# Altium PCB opm.PcbDoc (part 6 of 6)
Units mil, origin at the board's own origin, x right, y up, seen from the top; angles counter-clockwise.
Board outline 4280 x 1445 mil, 4 copper layers (Signal Plane 1, Ground, Power, Signal Plane 2), stack 59.778 mil thick; 104 components, 61 nets, 369 pads, 159 vias.
Unrouted connection lines stored in the file: 4.
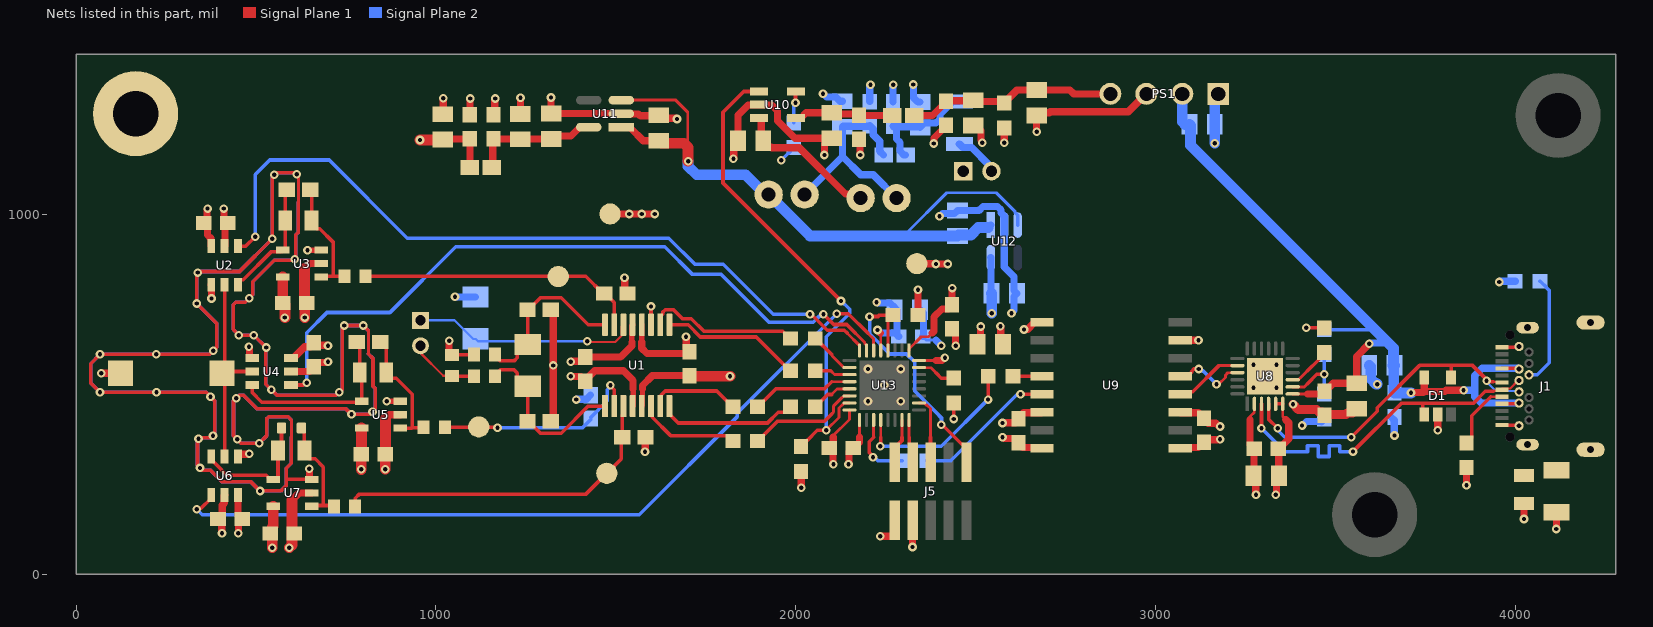
[diagram p4: the nets of this part, all layers, seen from the top]

## Via types
v1: diameter 24, hole 12, Signal Plane 1 to Signal Plane 2, tented both sides, 150 vias
v2: diameter 24, hole 12, Signal Plane 1 to Signal Plane 2, tented bottom, 9 vias

## Nets (pads, with @x,y where several pads share a name; then routed paths per layer and width w, separated by ;. In a path a pad name is that pad's centre, name@x,y a point inside that pad or via, vN(x,y) a via of type N, cw(c..) or ccw(c..) an arc to the next point about the centre after c; other vN are vias at no path point)
+3V3_A: C2.1 C6.1 C8.1 C9.1 C11.1 C12.1 C14.1 C39.1 C40.1 FB3.2 U1.12 U2.2 U3.5 U4.2 U5.5 U6.2 U7.5 | length 1195
  Signal Plane 1 w15: U1.12@1546.77,467.01 1548,468.24 1548,515
  Signal Plane 1 w20: C14.1@394.09,153.04 C14.1@396.06,153.04 ; v1(405,113) 404.23,113.77 404.23,144.87 C14.1@396.06,153.04 ; v1(410,1016) 410.77,1015.23 410.77,985.69 420.45,976 C8.1@421.46,976 413.56,968.09 413.56,912.79 U2.2@412.56,911.79 ; U6.2@412.56,219.29 411.56,218.29 411.56,197.04 405.75,191.23 405.75,162.72 C14.1@396.06,153.04 ; U4.2@596.75,563 648.43,563 660,574.57 C11.1@660,576.54 660,578.5 669.69,588.19 697.11,588.19 698.92,590 v1(700,590) ; C39.1@1019,1207.69 1020.42,1209.11 1092.58,1209.11 C40.1@1094,1210.54 1094.22,1210.31 1094.22,1130.22 FB3.2@1094.45,1130 ; C39.1@1020.35,1206.77 C39.1@1020.42,1206.69 ; v1(1375,550) 1375.77,549.23 1402.3,549.23 1403.35,548.19 1405.31,548.19 C2.1@1415,538.5 ; C2.1@1415,536.54 C2.1@1415,538.5 ; 1548,515 1548,538.46 1521.46,565 1441.5,565 C2.1@1415,538.5
  Signal Plane 1 w30: C12.1@539.09,113.04 540.31,113.04 545,108.35 v1(545,73) ; C12.1@541.06,113.04 545.75,117.72 545.75,131.03 547.56,132.84 U7.5@547.56,188.24 ; U3.5@573.92,825.64 574.01,825.64 574.01,753.13 C6.1@574.09,753.04 575.31,753.04 580,748.35 v1(580,713) ; v1(792,291) 792,332.46 C9.1@792.54,333 ; C9.1@793.36,333.82 U5.5@793.36,405.6 ; v1(955.77,1206.77) C39.1@1020.35,1206.77
+3V3_D: C1.1 C22.1 C42.1 C47.1 C48.1 C49.1 C50.1 C51.1 J5.1 pad.16 R16.1 R21.2 U1.13 U9.14 U12.5 U13.1 U13.5 U13.17 | length 1581.1
  Signal Plane 1 w8: 2177.61,380 U13.17@2177.61,428.34 ; v1@2235,670 2236.66,668.34 U13.5@2236.66,621.35 ; U13.1@2315.4,621.35 2315.4,625.6 2349.31,659.51 2369.51,659.51 2380,670
  Signal Plane 1 w15: U1.13@1572.36,467.01 1574.29,468.94 1574.29,515
  Signal Plane 1 w20: 1574.29,515 1574.29,524.29 1601.54,551.54 C1.1@1705,551.54 ; R16.1@2015,285.48 2015.5,284.98 2015.5,240.5 v1(2016,240) ; v1(2147,305) 2147,306.08 2148.35,307.43 2148.35,340.31 2158.03,350 C51.1@2160,350 ; C51.1@2161.97,350 2177.61,365.64 2177.61,380 ; v1(2227.61,678.48) 2227.61,677.39 v1@2235,670 ; v1(2235,105) 2270.43,105 2275,109.57 J5.1@2275,149.88 ; pad.16@2337,863 2337.5,862.5 2389.5,862.5 v1(2390,862) v1(2423,862) ; R21.2@2339.52,720 2339.76,720.24 2339.76,789.76 v1(2340,790) ; 2380,670 2385,675 2385,715 2406.81,736.81 2425.31,736.81 2435,746.5 C50.1@2435,748.46 v1(2435,795) ; C49.1@2506,629 2513.54,636.54 2513.54,687.23 v1(2514.31,688) ; v1(2575,420) 2575.77,420.77 2610.31,420.77 2620,430.45 C22.1@2620,431.93 ; C22.1@2620,433.9 2634.29,448.19 2683.19,448.19 U9.14@2685,450
  Signal Plane 1 w30: C1.1@1705,551.54 1706.54,550 v1(1817.5,550)
  Signal Plane 2 w8: C47.1@2281.55,664.99 C47.1@2281.55,670
  Signal Plane 2 w20: v1(2225,756) 2226.08,756 2228.58,753.5 2262.69,753.5 2274.69,741.5 C48.1@2274.69,735 ; v1(2227.61,678.48) 2228.69,678.48 2237.48,669.69 2276.85,669.69 2281.55,664.99 C47.1@2286.54,660 ; C48.1@2279.74,734.91 2281.55,733.11 C47.1@2281.55,670 ; U12.5@2542.6,879.71 2543.38,878.92 2543.38,781.31 C42.1@2544.69,780
  Signal Plane 2 w30: C42.1@2544.69,780 2545,779.69 v1(2545,725)
ADC_CS: R22.1 U1.2 | length 428.7
  Signal Plane 1 w10: U1.2@1623.54,692.99 1623.54,715.83 1630.06,722.35 1630.06,727.27 1637.69,734.9 1660.58,734.9 1685.48,710 1710,710 1745,675 1964.57,675 1984.57,655 R22.1@1985.48,655
ADC_DIN: R24.1 U1.16 | length 387.8
  Signal Plane 1 w10: U1.16@1649.13,467.01 1649.13,444.17 1673.31,420 1921.89,420 1951.96,450.08 1969.64,450.08 1984.57,465 R24.1@1985.48,465
ADC_DOUT: R2.2 U13.12 | length 284.3
  Signal Plane 1 w8: 2100,534.68 U13.12@2150,534.68
  Signal Plane 1 w10: R2.2@1894.52,465 1895.43,465 1945.43,515 2080.32,515 2100,534.68
ADC_DRDY: R1.2 U13.14 | length 317.1
  Signal Plane 1 w8: 2100,445 2105,450 2105,466.46 2106.13,467.59 2106.13,467.7 2128.43,490.01 2128.99,490.01 2134.3,495.31 U13.14@2150,495.31
  Signal Plane 1 w10: R1.2@1894.52,370 1949.52,425 2080,425 2100,445
ADC_SCLK: R23.1 U1.1 | length 389.4
  Signal Plane 1 w10: U1.1@1649.13,692.99 1700.99,692.99 1734.99,659 1890.57,659 1984.57,565 R23.1@1985.48,565
D_N: D1.4 J1.A7 J1.B7 U8.4 | length 964.9
  Signal Plane 1 w6: 3940,534.09 3961.9,534.09 J1.A7@3963.74,532.24
  Signal Plane 1 w10: U8.4@3314.84,473.18 3314.84,430.16 v1(3340,405) ; v1(3545,380) 3617.23,452.23 3617.23,462.53 3734.7,580 3820,580 ; D1.4@3822.4,545.98 3822.34,546.04 3822.34,577.66 3820,580 ; 3940,534.09 3939.77,534.32 3923.68,534.32 v1(3921,537) 3921,540.79 3881.79,580 3820,580
  Signal Plane 2 w6: v1(3921,537) 3921,534 3940,515 3945.75,509.25 J1.B7@4011.18,509.25
  Signal Plane 2 w10: v1(3340,405) 3340,400.13 3360.13,380 v1(3545,380)
D_P: D1.1 J1.A6 J1.B6 U8.3 | length 1018.9
  Signal Plane 1 w6: 3940,508.65 3941.01,509.65 3959.73,509.65 J1.A6@3963.54,513.46 ; J1.A6@3963.54,515.16 3963.85,515.46 3985.9,515.46 J1.B6@4011.18,540.75
  Signal Plane 1 w10: v1(3295,405) 3295.16,405.16 U8.3@3295.16,473.18 ; v1(3549.59,340.41) 3683.44,474.26 3743.51,474.26 ; D1.1@3747.6,444.02 3743.51,448.1 3743.51,474.26 ; 3940,508.65 3939.23,507.87 3917.21,507.87 3883.59,474.26 3743.51,474.26
  Signal Plane 2 w10: v1(3295,405) 3359.59,340.41 3418,340.41 3423,340.41 3423,356.94 3453,356.94 3453,326.72 3483,326.72 3483,356.94 3513,356.94 3513,340.41 3529,340.41 v1(3549.59,340.41)
DGND: C1.2 C2.2 C3.2 C4.2 C5.2 C6.2 C8.2 C9.2 C11.2 C12.2 C14.2 C22.2 C24.1 C26.2 C27.1 C28.1 C29.2 C30.1 C31.2 C32.1 C33.2 C34.2 C35.2 C36.2 C37.2 C38.2 C39.2 C40.2 C41.2 C42.2 C43.2 C44.2 C46.2 C47.2 C48.2 C49.2 C50.2 C51.2 J3.1 J5.3 pad.15 pad.MH1 PD1.A PS1.3 R14.2 R17.1 R19.2 R20.2 R26.1 U1.3 U1.4 U1.5 U2.3 U2.4 U3.2 U3.3 U4.3 U4.4 U5.2 U5.3 U6.3 U6.4 U7.2 U7.3 U9.9 U9.16 U10.2 U11.2 U12.2 U13.16 U13.32 | length 14657.5
  Signal Plane 1 w8: 617.56,1034 v1@617.56,1107.44 ; 812,612 812,677 ; 2104.72,380 2104.72,384.72 2150,430 U13.16@2150,455.94 ; U13.32@2343.01,593.74 2390,593.74
  Signal Plane 1 w9: 598,380 598,428
  Signal Plane 1 w10: v1@527,629 527,528 v1(542.5,512.5) 558,497 723,497 v1(731.5,505.5) 739,513 739,685.14 v1(744.86,691) v1(798,691) 812,677 ; v1(527.88,629.76) v1(493.64,664) v1(452,664) 436,680 436,749 443,756 470,756 491,777 491,813 550,872 604,872 v1(607,875) 610,878 610,943 617.56,950.56 617.56,1034 ; 598,380 598,308 584,294 584,263.04 ; 598,428 589,437 534.86,437 529,431.14 529,384 v1(509,364) 458,364 v1(447.5,374.5) 437,385 437,481 v1(445,489) 453,497 465,497 503,459 750,459 v1(765,444) 816,444 v1(823.5,451.5) 831,459 831,516 825,522 825,599 812,612 ; v1@617.56,1107.44 609,1116 556,1116 545,1105 v1(545,932) 454,841 404,841 340.86,841 335,835.14 v1(335,752) 390,697 390,630 371,611 v1(222.5,611) v1(66,611) 40,585 40,531 v1(66,505) v1(223,505) 361,505 385,481 385,389 375,379 342.86,379 337,373.14 337,302 351,288 374,288 406,256 486,256 v1(511,231) 569,231 584,246 584,263.04 ; U7.3@648.77,263.04 584,263.04 ; R19.2@1045.24,609.76 R20.2@1105.24,609.76 ; U1.3@1597.98,713.9 v1(1598,744) ; v1(2440,431) R26.1@2440,475.48
  Signal Plane 1 w15: v1@643.44,900.44 U3.3@680.92,900.44 ; U7.3@648.77,263.04 U7.3@654.84,263.04 ; U3.3@680.92,900.72 U3.3@681.2,900.44 ; v1(863,480) 863.2,480.2 900.44,480.2 U5.3@900.64,480.4 ; 1544.84,645 1544.84,691.06 U1.5@1546.77,692.99 ; 1572.36,645 U1.4@1572.36,692.99
  Signal Plane 1 w20: v1(69,558) PD1.A@123.25,558 ; v1(365,1016) 363.28,1014.28 363.28,984.74 C8.2@354.54,976 355.47,976 365.15,966.31 365.15,942.85 374.16,933.84 374.16,912.79 U2.3@375.16,911.79 ; U2.4@375.16,804.29 375.58,803.87 375.58,766.42 v1(376,766) ; U6.3@449.96,219.29 449.96,162.72 C14.2@459.65,153.04 ; U6.4@449.96,326.79 449.96,332.23 450.96,333.23 480.23,333.23 v1(481,334) ; v1(450,113) 450.77,113.77 450.77,143.35 460.45,153.04 C14.2@461.02,153.04 ; v1(480,632) 481.72,630.28 481.72,603.9 485.22,600.4 U4.4@489.25,600.4 ; U4.3@596.75,600.4 605,600.4 606,601.4 606,602.61 635.2,631.81 650.31,631.81 660,641.5 C11.2@660,642.71 ; 599.37,204.85 620.16,225.64 U7.2@654.84,225.64 ; 634.37,849.37 648.04,863.04 U3.2@681.2,863.04 ; v1(643,900) v1@643.44,900.44 ; v1(648,293) 648.77,292.23 U7.3@648.77,263.04 ; C11.2@660,643.46 667.53,635.94 697.98,635.94 698.92,635 v1(700,635) ; v1(859,291) v1@859.23,291.23 ; C9.2@859.23,332.77 C9.2@859.46,333 ; 859.46,432.46 870,443 U5.2@900.64,443 ; C39.2@1019,1278.31 1020,1279.31 v1(1020,1323) ; v1(1036.53,648.47) 1036.53,618 R19.2@1045,609.53 R19.2@1045.24,609.76 ; C40.2@1094,1277.46 1094.5,1277.96 1094.5,1321.5 v1(1095,1322) ; R20.2@1105.24,609.76 R20.2@1105.47,610 ; C38.2@1160,1277.46 1163.28,1280.74 1163.28,1320.28 v1(1165,1322) ; C37.2@1235,1279.31 v1(1235,1324) ; C44.2@1319.55,425 1326,431.45 v1(1326,580) 1326,728.55 C46.2@1319.55,735 ; v1(1320,1325) C36.2@1320,1280.31 U11.2@1514.99,1280.31 ; v1(1375,590) 1376.08,590 1377.89,591.81 1405.31,591.81 1415,601.5 C2.2@1415,603.46 1513.46,603.46 1544.84,634.84 1544.84,645 ; pad.15@1484,1001 v1(1537,1001) v1(1572,1001) v1(1608,1001) ; U11.2@1515.29,1280 1516.08,1279.22 1563.03,1279.22 1568.27,1273.98 C35.2@1614.76,1273.98 ; v1(1524,824) 1524.77,823.23 1524.77,787.78 C5.2@1532.55,780 ; 1572.36,645 1572.36,627.64 1586.72,613.28 1699.82,613.28 C1.2@1705,618.46 1695.77,627.7 1695.77,659.23 v1(1695,660) ; v1(1581,340) 1581.77,340.77 1581.77,379.22 C3.2@1582.55,380 ; C35.2@1620,1275.31 1628,1267.31 1666.61,1267.31 1668.92,1265 v1(1670,1265) ; v1(1827,1155) 1827.77,1155.77 1827.77,1193.38 C34.2@1839.39,1205 1839.39,1275.39 1868,1304 1897.69,1304 U10.2@1898.69,1305 1899.69,1304 1933.63,1304 1949.69,1287.93 1949.69,1260.37 1998.53,1211.54 C33.2@2080,1211.54 ; v1(2080,1165) 2080,1197.19 2094.5,1211.69 C33.2@2101,1211.69 ; C51.2@2093.07,350 C51.2@2094.55,350 ; 2104.72,380 2104.72,359.69 2095.04,350 C51.2@2094.55,350 ; v1(2105,305) 2104.23,305.77 2104.23,340.31 C51.2@2094.55,350 ; C32.1@2176,1208.54 2179.23,1205.3 2179.23,1165.77 v1(2180,1165) ; v1(2325,75) J5.3@2325,149.88 ; v1(2384,1197) 2384.77,1197.77 2384.77,1212.33 2418,1245.57 C30.1@2418,1247.54 ; 2390,593.74 2406.66,593.74 2413.92,601 v1(2415,601) ; C50.2@2435,681.54 2444.23,672.3 2444.23,635.77 v1(2445,635) ; C31.2@2494,1246.69 2500.5,1246.69 2515,1232.19 2515,1205.44 2519,1201.44 v1(2519,1199) ; v1(2569.31,689) 2570.07,688.23 2570.07,635.54 C49.2@2576.46,629.15 ; v1(2575,380) 2576.08,380 2579.43,376.65 2610.31,376.65 2610.77,376.2 2610.77,374.23 C22.2@2620,365 ; v1@2580,1200 R14.2@2580,1240.48 ; C22.2@2620,363.03 2631.22,351.81 2683.19,351.81 U9.16@2685,350 ; v1(2635,680) 2635.77,680.77 2645.1,680.77 2664.33,700 U9.9@2685,700 ; v1(2670,1230) C24.1@2670,1274.69 2678,1282.69 2705.13,1282.69 2707.43,1285 2925,1285 PS1.3@2975,1335
  Signal Plane 1 w30: v1(592.19,73.27) 599.37,80.45 599.37,108.35 C12.2@604.06,113.04 ; 599.37,204.85 599.37,117.72 C12.2@604.06,113.04 ; C12.2@606.02,113.04 C12.2@604.06,113.04 ; 634.37,849.37 634.37,757.72 639.06,753.04 C6.2@641.02,753.04 ; v1(635,713) C6.2@635,748.35 ; v1@859.23,291.23 C9.2@859.23,332.77 ; C9.2@859.46,333 859.46,432.46
  Signal Plane 2 w8: 617.56,1034 v1@617.56,1107.44 ; 812,612 812,677 ; C47.2@2353.46,660 2363.15,650.31 2389.69,650.31 2390,650
  Signal Plane 2 w9: 598,380 598,428
  Signal Plane 2 w10: v1@527,629 527,528 v1(542.5,512.5) 558,497 723,497 v1(731.5,505.5) 739,513 739,685.14 v1(744.86,691) v1(798,691) 812,677 ; v1(527.88,629.76) v1(493.64,664) v1(452,664) 436,680 436,749 443,756 470,756 491,777 491,813 550,872 604,872 v1(607,875) 610,878 610,943 617.56,950.56 617.56,1034 ; 598,380 598,308 584,294 584,246 569,231 v1(511,231) 486,256 406,256 374,288 351,288 337,302 337,373.14 342.86,379 375,379 385,389 385,481 361,505 v1(223,505) v1(66,505) 40,531 40,585 v1(66,611) v1(222.5,611) 371,611 390,630 390,697 v1(335,752) 335,835.14 340.86,841 404,841 454,841 v1(545,932) 545,1105 556,1116 609,1116 v1@617.56,1107.44 ; 598,428 589,437 534.86,437 529,431.14 529,384 v1(509,364) 458,364 v1(447.5,374.5) 437,385 437,481 v1(445,489) 453,497 465,497 503,459 750,459 v1(765,444) 816,444 v1(823.5,451.5) 831,459 831,516 825,522 825,599 812,612 ; v1@1960.13,1150 R17.1@1994.69,1184.57
  Signal Plane 2 w20: v1(1053,771) 1053.44,770.56 1109.56,770.56 C43.2@1110,770.12 ; v1(1390,485) 1390.77,485.77 1418.22,485.77 C4.2@1430,497.55 ; v1(1960,1150) v1@1960.13,1150 ; R17.1@1994.69,1184.57 R17.1@1994.69,1185.48 ; v1(2076,1335) 2077.08,1335 2085.78,1326.31 2111.5,1326.31 2123.5,1314.31 C28.1@2130,1314.31 ; C29.2@2206,1313.46 2206,1356.92 2208,1358.92 v1(2208,1360) ; C26.2@2271,1312.46 v1(2271,1360) ; v1(2327,1361) 2327.77,1360.23 2327.77,1324.31 2339.77,1312.31 C27.1@2346,1312.31 ; C48.2@2345.31,735 2355.31,725 2355.31,661.84 C47.2@2353.46,660 ; 2390,650 v1(2405,635) ; v1(2400,995) 2401.08,995 2408.39,1002.31 2442,1002.31 C41.2@2450,1010.31 2509.13,1010.31 2520.65,1021.83 2561.28,1021.83 2570.65,1012.46 2570.65,1004.24 2580,994.89 U12.2@2580,970.29 2580,853.95 2607.31,826.64 2607.31,788 C42.2@2615.31,780 2607.31,772 2607.31,733.39 2600,726.08 v1(2600,725)
  other v1: 344,295 339.93,376.07 380,384 373,493 380.5,620.5 480.5,766.5 337.93,838.07 550.5,1110.5 613.28,1111.72 2580,1199
  other v2: 2201,480 2292,480 2246.51,524.84 2201,570 2292,570
NetC3_1: C3.1 pad.TP3 R8.2 U1.11 | length 936.9
  Signal Plane 1 w10: 775.53,208 775.53,210.56 787.26,222.29 789.82,222.29 789.86,222.33 1417.33,222.33 1515,320 1515,377.55 C3.1@1517.45,380 1517.45,440.44 1521.18,444.17 U1.11@1521.18,467.01
NetC4_1: C4.1 pad.TP2 R6.2 U1.10 | length 589.5
  Signal Plane 1 w10: R6.2@1024.53,408 1170,408 v1(1171,407) ; v1(1485,525) 1485,523.27 1495.59,512.68 U1.10@1495.59,467.6
  Signal Plane 2 w10: v1(1171,407) 1407.43,407 C4.1@1430,429.57 ; C4.1@1430,435.34 1476.16,481.5 1476.16,512.37 1485,521.21 v1(1485,525)
NetC5_1: C5.1 pad.TP1 R4.2 U1.7 | length 780.3
  Signal Plane 1 w10: R4.2@804.53,828 1416.57,828 1464.57,780 C5.1@1467.45,780 ; C5.1@1470.34,780 1495.59,754.75 U1.7@1495.59,692.99
NetC7_1: C7.1 R3.1 U2.6 U3.4 | length 340
  Signal Plane 1 w10: U2.6@449.96,804.29 449.96,812.54 455.96,818.54 464.21,818.54 541.11,895.44 568.92,895.44 U3.4@573.92,900.44 ; U3.4@575.94,900.44 580.94,905.44 R3.1@580.94,983.04 580.94,1063.97 C7.1@585.01,1068.04
NetC7_2: C7.2 R3.2 R4.1 U3.1 | length 338.1
  Signal Plane 1 w10: C7.2@654.17,1068.97 654.17,974.18 668.27,960.09 677.13,960.09 713.96,923.25 713.96,828.04 ; U3.1@681.2,825.64 683.6,828.04 713.96,828.04 ; R4.1@747.43,828.04 713.96,828.04
NetC10_1: C10.1 R5.1 U4.6 U5.4 | length 502.6
  Signal Plane 1 w10: U4.6@488.81,520.64 488.81,520.33 489.54,519.6 489.54,504.46 516,478 790.96,478 U5.4@793.36,480.4 793.36,555.03 R5.1@788.39,560 788.39,636.07 C10.1@779.45,645
NetC10_2: C10.2 R5.2 R6.1 U5.1 | length 348.5
  Signal Plane 1 w10: C10.2@844.55,645 846.69,645 861.61,630.08 R5.2@861.61,560 ; R5.2@861.61,558.24 875.71,544.15 889.85,544.15 934,500 934,406.6 ; U5.1@900.64,405.6 933,405.6 934,406.6 ; R6.1@965.07,405.6 964.07,406.6 934,406.6
NetC13_1: C13.1 R7.1 U6.6 U7.4 | length 361.7
  Signal Plane 1 w10: U6.6@375.16,326.79 375.16,318.54 389.93,303.77 389.93,303.61 418.54,275 527.56,275 533.42,269.14 533.42,268.04 538.42,263.04 555.94,263.04 560.94,268.04 R7.1@560.94,343.04 570.44,352.54 C13.1@570.44,406
NetC13_2: C13.2 R7.2 R8.1 U7.1 | length 314.2
  Signal Plane 1 w10: C13.2@625.56,406 625.56,404.04 634.17,395.43 R7.2@634.17,343.04 634.17,334.18 648.27,320.09 664.29,320.09 687,297.37 687,191.3 ; U7.1@654.84,188.24 657.24,190.64 684.33,190.64 ; 685,191.3 684.33,190.64 ; R8.1@716.47,188 713.83,190.64 684.33,190.64
NetC26_1: C26.1 C27.2 F1.1 FB1.2 | length 320.5
  Signal Plane 2 w20: FB1.2@2305.55,1165 2300.68,1165 2289.84,1175.83 2289.84,1200.16 2280.69,1209.31 2280.69,1235.85 C26.1@2271,1245.54 2272.92,1243.61 2344.08,1243.61 C27.2@2346,1241.69 2358,1253.69 2389.28,1253.69 2401,1265.41 2401,1277.77 2437.28,1314.05 F1.1@2455,1314.05
NetC28_2: C28.2 C29.1 FB1.1 J2.2 J4.2 | length 605.1
  Signal Plane 2 w20: J2.2@2025,1055 2130.5,1160.5 ; FB1.1@2244.45,1165 2233.74,1175.71 2233.74,1203.26 2215.69,1221.31 2215.69,1236.85 C29.1@2206,1246.54 2204.58,1245.11 2131.42,1245.11 C28.2@2130,1243.69 2130.5,1243.19 2130.5,1160.5 ; J4.2@2280.58,1045.2 2215.79,1110 2181,1110 2130.5,1160.5
NetC32_2: C32.2 C33.1 FB2.1 U10.4 | length 277.2
  Signal Plane 1 w20: U10.4@2000.69,1268 2014.69,1268 2029,1282.31 C33.1@2101,1282.31 2104.42,1278.89 2172.58,1278.89 C32.2@2176,1275.46 2176.23,1275.23 2268.66,1275.23 FB2.1@2268.89,1275
NetC34_1: C34.1 J4.1 U10.3 | length 411
  Signal Plane 1 w20: U10.3@1898.69,1268 1903.35,1268 1904.35,1267 1904.35,1210.65 C34.1@1910,1205 1910,1198.5 1922,1186.5 1932.22,1186.5 1933.72,1185 2010,1185 2138.56,1056.44 2169.34,1056.44 J4.1@2180.58,1045.2
NetC36_1: C36.1 C37.1 C38.1 FB3.1 U11.5 | length 361.9
  Signal Plane 1 w20: FB3.1@1155.55,1130 1157.78,1132.22 1157.78,1208.31 C38.1@1160,1210.54 1160.92,1209.61 1234.08,1209.61 C37.1@1235,1208.69 1235.5,1209.19 1319.5,1209.19 C36.1@1320,1209.69 1328,1217.69 1375.2,1217.69 1400.11,1242.6 U11.5@1424.71,1242.6
NetC43_1: C43.1 RT1.1 U1.6 | length 623.9
  Signal Plane 1 w6: v1(1421,647) 1423,645 1498.12,645 1516.11,662.99 1516.11,687.49 U1.6@1521.61,692.99
  Signal Plane 2 w6: RT1.1@957,705.43 1051.51,705.43 1103.06,653.88 C43.1@1110,653.88 1116.88,647 v1(1421,647)
NetF1_2: F1.2 J3.2 | length 127.1
  Signal Plane 2 w20: F1.2@2455,1195.94 2464.69,1186.26 2488.74,1186.26 2538.34,1136.66 2538.34,1126.03 J3.2@2544.37,1120
NetJ1_A5: J1.A5 R10.1 | length 187.3
  Signal Plane 1 w6: 3932.87,492.87 3940,492.87 J1.A5@3963.74,492.87
  Signal Plane 1 w10: R10.1@3865,364.52 3879.92,379.44 3879.92,439.92 3932.87,492.87
NetJ1_B5: J1.B5 R11.1 | length 307.9
  Signal Plane 2 w10: J1.B5@4038.94,553.9 4061.9,553.9 4095,587 4095,788.52 4087.36,796.16 4087.36,797.08 4070.43,814 R11.1@4069.52,814
NetPD1_K: PD1.K U2.5 U4.5 U6.5 | length 534.6
  Signal Plane 1 w10: PD1.K@405.75,558 410.75,563 U4.5@489.25,563 ; 412.56,346.79 PD1.K@412.56,553.79 ; PD1.K@412.56,562.29 U2.5@412.56,804.29
NetR1_1: R1.1 U1.14 | length 284
  Signal Plane 1 w10: U1.14@1597.95,467.01 1601.02,463.94 1601.02,436.18 1652.28,384.92 1810.56,384.92 R1.1@1825.48,370
NetR2_1: R2.1 U1.15 | length 253.7
  Signal Plane 1 w10: U1.15@1623.54,467.01 1626.61,470.08 1626.61,497.84 1637.69,508.91 1780.65,508.91 1824.57,465 R2.1@1825.48,465
NetR9_2: R9.2 R12.2 U8.8 | length 213
  Signal Plane 1 w8: U8.8@3381.82,520.47 3414.58,520.47 3423.18,529.07
  Signal Plane 1 w10: 3423.18,529.07 3449.11,555 v1(3470,555)
  Signal Plane 2 w10: R12.2@3470,500 v1(3470,555) R9.2@3470,610.48
NetR13_1: R13.1 U8.9 | length 121.4
  Signal Plane 1 w8: U8.9@3381.82,540.16 3397.37,540.16 3402.34,545.13 3403.08,545.13 3423.18,565.23
  Signal Plane 1 w10: 3423.18,565.23 3454.08,596.13 3454.08,599.56 R13.1@3470,615.48
NetR16_2: R16.2 U10.1 U13.15 | length 1383.4
  Signal Plane 1 w8: v1(2085,400) 2120.13,435.13 2120.13,461.9 2128.55,470.32 2130.44,470.32 2135.75,475.63 U13.15@2150,475.63
  Signal Plane 1 w10: U10.1@1898.69,1342 1898.19,1341.5 1855.5,1341.5 1798,1284 1798,1087 v1(2126,759) ; R16.2@2015,354.52 2015,355.43 2030.92,371.36 2031.84,371.36 2060.48,400 v1(2085,400)
  Signal Plane 2 w10: v1(2085,400) 2085,660 2150,725 2150,736 2127,759 v1(2126,759)
NetR17_2: R17.2 U10.5 | length 90
  Signal Plane 1 w10: v1(1999.69,1310) 1999.69,1341 U10.5@2000.69,1342
  Signal Plane 2 w10: R17.2@1994.69,1254.52 1994.69,1301.21 1999.69,1306.21 v1(1999.69,1310)
NetR18_2: R18.2 R19.1 RT1.2 | length 197.8
  Signal Plane 1 w6: RT1.2@957,634.57 957,614.57 1020.22,551.34 1044.13,551.34 R19.1@1045,550.47
  Signal Plane 1 w10: R19.1@1042.44,550.47 R19.1@1045,550.47 1045.47,550 R18.2@1105.47,550
NetR22_2: R22.2 U13.10 | length 130.5
  Signal Plane 1 w8: 2100,610.43 2101.8,608.64 2101.8,606.11 2133.23,574.68 2149.38,574.68 U13.10@2150,574.06
  Signal Plane 1 w10: R22.2@2054.52,655 2055.43,655 2100,610.43
NetR23_2: R23.2 U13.11 | length 99.9
  Signal Plane 1 w8: 2100,562.74 2108.37,554.37 U13.11@2150,554.37
  Signal Plane 1 w10: R23.2@2054.52,565 2097.74,565 2100,562.74
NetR24_2: R24.2 U13.13 | length 116.2
  Signal Plane 1 w8: 2100,499.25 2115.13,514.38 2149.38,514.38 U13.13@2150,515
  Signal Plane 1 w10: R24.2@2054.52,465 2055.43,465 2089.43,499 2099.75,499 2100,499.25
NetR25_1: R25.1 U9.13 | length 396.6
  Signal Plane 1 w10: v1(2625,500) U9.13@2685,500
  Signal Plane 2 w10: R25.1@2365,315 2431,315 2613.32,497.32 2622.32,497.32 v1(2625,500)
NetR25_2: R25.2 U13.19 | length 197.6
  Signal Plane 1 w8: 2216.98,380 U13.19@2216.98,428.34
  Signal Plane 1 w10: v1(2215,325) 2215,327.86 2205,337.86 2205,368.02 2216.98,380
  Signal Plane 2 w10: v1(2215,325) 2218.79,325 2228.79,315 R25.2@2295.97,315
NetR26_2: R26.2 U13.31 | length 109.2
  Signal Plane 1 w8: U13.31@2343.01,574.06 2343.63,573.43 2376.16,573.43 2390,559.59
  Signal Plane 1 w10: 2390,559.59 2405.08,544.52 R26.2@2440,544.52
NetR27_1: R27.1 U9.12 | length 80.5
  Signal Plane 1 w10: R27.1@2604.52,550 U9.12@2685,550
NetR27_2: R27.2 U13.20 | length 493.1
  Signal Plane 1 w8: 2236.66,380 U13.20@2236.66,428.34
  Signal Plane 1 w10: v1(2235,355) 2236.66,356.66 2236.66,380 ; v1(2535,485) 2535.48,485.48 R27.2@2535.48,550
  Signal Plane 2 w10: v1(2235,355) 2405,355 v1(2535,485)
NetU8_20: U8.20 U9.4 | length 192.3
  Signal Plane 1 w8: 3178.18,579.53 U8.20@3228.18,579.53
  Signal Plane 1 w10: U9.4@3068.86,500 3075.67,506.81 3104.28,506.81 3177,579.53 3178.18,579.53
NetU8_21: U8.21 U9.5 | length 203.6
  Signal Plane 1 w8: v1@3173.79,528 3176.59,528 3194.71,546.12 3194.71,552.71 3201.55,559.55 3227.89,559.55 U8.21@3228.18,559.84
  Signal Plane 1 w10: U9.5@3068.86,550 3089.53,550 3101,561.47 3101,564.14 3106.86,570 v1(3121,570) ; v1(3170,528) v1@3173.79,528
  Signal Plane 2 w10: v1(3121,570) 3124.79,570 3130.38,564.41 3133.59,564.41 v1(3170,528)
nRESET: J5.10 R21.1 U13.4 | length 719.4
  Signal Plane 1 w8: v1(2205.2,714.89) v1@2206.31,716 ; U13.4@2256.35,621.35 2256.35,661.4 2257,662.05 2257,706.52 R21.1@2270.48,720
  Signal Plane 1 w10: v1@2206.31,716 2229.2,716 2233.2,720 R21.1@2270.48,720 ; v1(2405,415) 2407.82,415 2461.78,361.04 2464.43,361.04 2475,350.47 J5.10@2475,310.12
  Signal Plane 2 w10: v1(2205.2,714.89) 2205.61,714.48 2205.61,670 2205.61,667.8 2261.61,611.8 2308.2,611.8 2331.61,588.39 2331.61,507.8 2390,449.41 2405.61,433.8 2405.61,415.61 v1(2405,415)
SEL1: U6.1 U13.6 | length 2248
  Signal Plane 1 w8: 2200.15,670 2216.98,653.18 U13.6@2216.98,621.35
  Signal Plane 1 w10: v1(335,180) 337.68,182.68 346.8,182.68 375.16,211.04 U6.1@375.16,219.29 ; v1(2114,724) 2146.15,724 2200.15,670
  Signal Plane 2 w10: v1(335,180) 350,165 1565,165 1838.16,438.16 1838.16,448.16 v1(2114,724)
SEL2: U4.1 U13.7 | length 1973.9
  Signal Plane 1 w8: 2165.84,670 2191.99,643.85 2191.99,640.91 U13.7@2196.67,636.22
  Signal Plane 1 w10: U4.1@596.75,525.6 630.81,525.6 637.21,532 v1(641,532) ; v1(2077.19,722.19) 2105.51,693.87 2141.97,693.87 2165.84,670
  Signal Plane 2 w10: v1(641,532) 641,671 697,727 872,727 1055,910 1636,910 1713,833 1793,833 1925.81,700.19 2049.11,700.19 2065.06,716.14 2067.35,716.14 2073.4,722.19 v1(2077.19,722.19)
SEL3: U2.1 U13.8 | length 2140.4
  Signal Plane 1 w8: 2143.21,670 U13.8@2176.99,636.22
  Signal Plane 1 w10: U2.1@449.96,911.79 471.31,911.79 v1(497.56,938.04) ; v1(2040,722.19) 2043.65,722.19 2087.97,677.87 2135.34,677.87 2143.21,670
  Signal Plane 2 w10: v1(497.56,938.04) 497.56,1110.56 538,1151 703,1151 920.5,933.5 1647.5,933.5 1720,861 1799,861 1937.81,722.19 v1(2040,722.19)
SHIELD_POUR: C25.2 J1.S1 J1.S2 J1.S3 J1.S4 R15.2
SWCLK: J5.4 U13.24 | length 122.2
  Signal Plane 1 w8: 2315.4,380 U13.24@2315.4,428.34
  Signal Plane 1 w10: 2315.4,380 2315.4,360.07 2325,350.47 J5.4@2325,310.12
SWDIO: J5.2 U13.23 | length 126.8
  Signal Plane 1 w8: 2295.72,380 U13.23@2295.72,428.34
  Signal Plane 1 w10: J5.2@2275,310.12 2275,350.47 2295.72,371.19 2295.72,380
SWO: J5.6 U13.26 | length 188.2
  Signal Plane 1 w8: U13.26@2343.01,475.63 2357.27,475.63 2362.57,470.32 2364.46,470.32 2375,459.79 2375,380
  Signal Plane 1 w10: J5.6@2375,310.12 2375,380
Temp_N: C45.2 C46.1 R20.1 U1.8 | length 484.5
  Signal Plane 1 w10: R20.1@1164.53,610 1164.53,607.44 1179.47,592.5 1217.13,592.5 1225.92,601.29 1225.92,615.98 1248.06,638.12 C45.2@1255,638.12 1255,734.45 C46.1@1254.45,735 1257.34,735 1290.76,768.42 1347.95,768.42 1423.38,692.99 U1.8@1470,692.99
Temp_P: C44.1 C45.1 R18.1 U1.9 | length 484.9
  Signal Plane 1 w10: R18.1@1164.53,550 1164.53,552.56 1179.47,567.5 1217.13,567.5 1225.92,558.71 1225.92,544.02 1248.06,521.88 C45.1@1255,521.88 C45.1@1254.45,521.33 ; C44.1@1254.45,425 1257.34,425 1290.76,391.58 1347.95,391.58 1423.38,467.01 U1.9@1470.43,467.01 ; C44.1@1255,425 C45.1@1255,521.33
USB_GND: C15.2 C16.1 C17.2 C18.2 C19.2 C20.2 C21.2 C23.1 C25.1 D1.2 J1.A1 J1.A12 J1.B1 J1.B12 PS1.1 R10.2 R11.2 R12.1 R15.1 U8.2 U8.25 U9.1 U9.7 | length 1291.6
  Signal Plane 1 w8: 3263.5,429.21 3263.5,437.71 3275.2,449.41 3275.2,472.91 U8.2@3275.47,473.18
  Signal Plane 1 w10: J1.A1@3963.74,414.13 3985,414.13 4009.41,414.13 J1.B12@4011.38,412.17 ; J1.A12@3963.74,630.67 3985,630.67 4009.41,630.67 J1.B1@4011.38,632.64
  Signal Plane 1 w20: U9.1@3068.86,350 3070.67,351.81 3120.31,351.81 3123.39,354.88 3125.31,354.88 3135,364.57 C21.2@3135,366.54 3141.74,373.28 3178.28,373.28 v1(3180,375) ; U9.7@3068.86,650 v1(3120,650) ; 3263.5,429.21 3263.5,358.39 3274.31,347.58 3274.31,274.42 C18.2@3273.39,273.5 3279.23,267.65 3279.23,220.77 v1(3280,220) ; v1(3785,400) D1.2@3785,444.02 ; v1(3865,247) R10.2@3865,295.48 ; v1(4025,153) R15.1@4025,195.63 ; v1(4115,125) C25.1@4115,172.09
  Signal Plane 1 w25: v1(3383,472) 3398,457 3423.18,457 3448.17,457 3454.48,450.69 3462.81,450.69 C19.2@3470,443.5 ; C19.2@3470,441.54 C19.2@3470,443.5 ; C20.2@3560,459.69 3548,447.69 3533.97,447.69 3529.78,443.5 C19.2@3470,443.5
  Signal Plane 2 w20: v1(3408,413) 3409.08,413 3420.08,423.99 3461.03,423.99 3462.03,422.99 R12.1@3470,430.97 ; C15.2@3655,436.54 3664.23,427.3 3664.23,385.77 v1(3665,385) ; v1(3956,812) 3957.08,812 3959.08,814 R11.2@4000.48,814
  Signal Plane 2 w30: v1(3165,1198) 3165,1249.69 C23.1@3165.31,1250 3165.31,1325.31 PS1.1@3175,1335 ; C16.1@3594.69,580 3598.69,576 3598.69,543.22 3613.91,528 v1(3617,528)
  other v2: 3273,518 3337,518 3273,582 3337,582
VBAT: C35.1 C41.1 J2.1 U11.1 U11.3 U12.1 U12.3 | length 1906.4
  Signal Plane 1 w8: U11.3@1515.29,1317.4 1666.6,1317.4 1700,1284 1700,1187
  Signal Plane 1 w20: U11.1@1515.29,1242.6 1538.78,1242.6 1540.83,1240.55 1540.83,1240.36 1576.5,1204.69 C35.1@1620,1204.69
  Signal Plane 1 w30: C35.1@1620,1204.69 1627,1197.69 1689.31,1197.69 1700,1187 1701,1186 v1(1701,1148)
  Signal Plane 2 w8: 2305,945 2420,1060 2557.8,1060 2610.35,1007.45 2610.35,1004.65
  Signal Plane 2 w10: 2610.35,1004.65 2617.4,997.6 U12.3@2617.4,970.29
  Signal Plane 2 w20: U12.1@2535.48,963.18 U12.1@2542.6,970.29
  Signal Plane 2 w30: v1(1701,1148) 1701,1134 1725,1110 1860.68,1110 1915.68,1055 J2.1@1925,1055 2040.31,939.69 C41.1@2450,939.69 2453,942.69 2487.2,942.69 2507.68,963.18 U12.1@2535.48,963.18
VBUS: C15.1 C16.2 C19.1 C20.1 C23.2 D1.5 J1.A4 J1.A9 J1.B4 J1.B9 PS1.2 R9.1 U8.7 | length 2257.3
  Signal Plane 1 w8: U8.7@3381.82,500.79 3423.18,500.79
  Signal Plane 1 w10: J1.A4@3963.74,473.19 4006.61,473.19 J1.B9@4009.53,476.11 ; J1.A9@3963.74,571.61 4009.41,571.61 J1.B4@4011.38,569.65
  Signal Plane 1 w20: 3423.18,500.79 3467.32,500.79 C19.1@3470,503.46 ; C19.1@3470,505.43 3494.87,530.31 C20.1@3560,530.31 3560,605 v1(3595,640) ; v1(3711,504) 3711.77,504.77 3744.77,504.77 3747.6,507.6 ; D1.5@3747.6,545.98 3747.6,507.6 ; v1(3857,511) 3808.4,511 3805,507.6 3747.6,507.6
  Signal Plane 2 w10: R9.1@3470,679.52 3604.52,679.52
  Signal Plane 2 w20: v1(3595,640) 3597.5,642.5 3647.5,642.5 ; v1(3857,511) 3888,511 ; J1.B4@4011.18,571.32 4010.2,570.34 4009.7,570.34 4007.8,572.24 3908.24,572.24 3888,552 3888,511 ; J1.B9@4011.38,475.16 3985,475.16 3940,475.16 3905.84,475.16 3888,493 3888,511
  Signal Plane 2 w30: PS1.2@3075,1335 3075,1257.69 C23.2@3082.69,1250 ; C23.2@3094.69,1250 3097.69,1247 3097.69,1192.31 3647.5,642.5 3662.31,627.69 3662.31,583 C16.2@3665.31,580 ; C16.2@3660.15,579.85 3662.65,577.35 3662.65,505.81 C15.1@3665,503.46 3710.46,503.46 v1(3711,504)
VBUS_3V3: C17.1 C18.1 C21.1 R13.2 U8.5 U8.6 U9.3 | length 473.7
  Signal Plane 1 w8: U8.6@3354.21,473.18 3354.21,437.54 3362.54,429.21
  Signal Plane 1 w10: U8.5@3334.53,473.18 U8.6@3354.21,473.18 ; v1@3420.24,684.76 R13.2@3469.76,684.76
  Signal Plane 1 w15: v1(3420,685) v1@3420.24,684.76 ; R13.2@3469.76,684.76 R13.2@3470,684.52
  Signal Plane 1 w20: U9.3@3068.86,450 3070.67,448.19 3120.31,448.19 3123.39,445.12 3125.31,445.12 3135,435.43 C21.1@3135,433.46 ; C21.1@3135,431.5 3147.19,419.31 3168.25,419.31 3177.56,410 v1(3180,410) ; v1(3335,220) 3336.72,221.72 3336.72,266.22 C18.1@3344,273.5 3343.08,274.42 3343.08,347.58 C17.1@3342.16,348.5 ; C17.1@3344.13,348.5 3371,375.37 3371,420.76 3362.54,429.21
VBUS_ISO: C24.2 C30.2 C31.1 FB2.2 PS1.4 R14.1 | length 572.1
  Signal Plane 1 w20: FB2.2@2343.5,1275 2380.5,1275 2418,1312.5 C30.2@2418,1314.46 2419.42,1315.89 2492.58,1315.89 C31.1@2494,1317.31 2497.9,1313.41 2576.1,1313.41 R14.1@2580,1309.52 ; R14.1@2580,1310.43 2614.87,1345.31 C24.2@2670,1345.31 2762.62,1345.31 2772.93,1335 PS1.4@2875,1335
pads on no net: D1.3 J1. J1.A2 J1.A3 J1.A8 J1.A10 J1.A11 J1.B2 J1.B3 J1.B8 J1.B10 J1.B11 J5.5 J5.7 J5.8 J5.9 U8.1 U8.10 U8.11 U8.12 U8.13 U8.14 U8.15 U8.16 U8.17 U8.18 U8.19 U8.22 U8.23 U8.24 U9.2 U9.6 U9.8 U9.10 U9.11 U9.15 U11.4 U12.4 U13.2 U13.3 U13.9 U13.18 U13.21 U13.22 U13.25 U13.27 U13.28 U13.29 U13.30 U13.33

## Polygon pours and split planes (outlines as drawn)
+3V3_A on Power "+3V3_A" (solid, pour order 0): 20,20 20,1425.14 1745,1425.14 1745,20
+3V3_D on Power "+3V3_D" (solid, remove dead copper, pour order 14): 1765,20 1765,1425 2720,1425 2720,1030 2720,20
VBUS_3V3 on Power "VBUS_3V3" (solid, remove dead copper, pour order 15): 3035,40 3035,1030 3035,1425 4260,1425 4260,770 3915,770 3915,650 4050,650 4050,395 3915,395 3915,220 4260,220 4260,19.96 3035,20.04
DGND on Ground "GND" (solid, remove dead copper, pour order 13): 20,20 20,1425 3015,1425 3015,1245 2720,1245 2720,20
USB_GND on Ground "USB_GND" (solid, remove dead copper, pour order 12): 3035,20 3035,995 3035,1425 4260,1425 4260,770 3915,770 3915,650 4050,650 4050,395 3915,395 3915,220 4260,220 4260,20
SHIELD_POUR on Signal Plane 1 "SHIELD_POUR_L01_P016" (solid, remove dead copper, pour order 16): 4260,240 3955,240 3955,385 4075,385 4075,660 3955,660 3955,750 4260,750 4260,660 4260,385

## Silkscreen, mask and mechanical layers (free items; w line width, h text height)
Top Overlay:
  lines w6: 1745,23 1745,63 ; 1745,1382 1745,1422 ; 1765,23 1765,63 ; 1765,1382 1765,1422 ; 2719.43,23 2719.43,63 ; 2719.43,1230 2719.43,1245 2734,1245 ; 2975,1422 3015,1422 3015,1407 ; 3000,1245 3015,1245 3015,1260 ; 3034.43,23 3034.43,63 ; 3035,1407 3035,1422
  lines w10: 1845,195 1955,195 1955,251 1955,403 1964,412
  text "Optical Power Meter" at 3472.06,1118 h60
  text "TP4" at 1420,1045 h40
  text "V1" at 3620.68,1040 h50
  text "-" at 2441.67,938 h40
  text "+" at 2521.67,931.67 h40
  text "TP1" at 1285,870 h40
  text "TP5" at 2175,835 h40
  text "TP2" at 1070,310 h40
  text "TP3" at 1465,175 h40
Mechanical 1:
  circle w1: c3985.79,664.13 r12.8
  circle w1: c4120,1275 r62.99
  circle w1: c3610,165 r62.99
  circle w1: c3985.79,380.67 r12.8
  lines w1: 0,0 4280,0 4280,1445 0,1445 0,0

## Text inside footprints (layer, text, board x,y; h text height)
U2: Top Overlay "*" at 456,975 h30 r270; Mechanical 13 "RefDes2" at 387.56,945.54 h50 r270; Mechanical 13 "*" at 419.56,890.04 h50 r270
U3: Top Overlay "*" at 704,803 h30 r180; Mechanical 13 "*" at 664.56,853.64 h50 r180
U4: Top Overlay "*" at 682,546 h30 r180; Mechanical 13 "*" at 575,556 h50 r180; Mechanical 13 "RefDes2" at 630.5,588 h50 r180
U5: Top Overlay "*" at 929,381 h30 r180; Mechanical 13 "*" at 884,433.6 h50 r180
U6: Top Overlay "*" at 337,205 h30 r90; Mechanical 13 "RefDes2" at 437.56,185.54 h50 r90; Mechanical 13 "*" at 405.56,241.04 h50 r90
U7: Top Overlay "*" at 681,155 h30 r180; Mechanical 13 "*" at 638.2,216.24 h50 r180